# Altium PCB ARDUINO Mega-MASTER_2021-11-28.pcbdoc
Units mil, origin at the board's own origin, x right, y up, seen from the top; angles counter-clockwise.
Board outline 5169.49 x 3120 mil, 2 copper layers (Top Layer, Bottom Layer); 1 components, 0 nets, 130 pads, 0 vias.
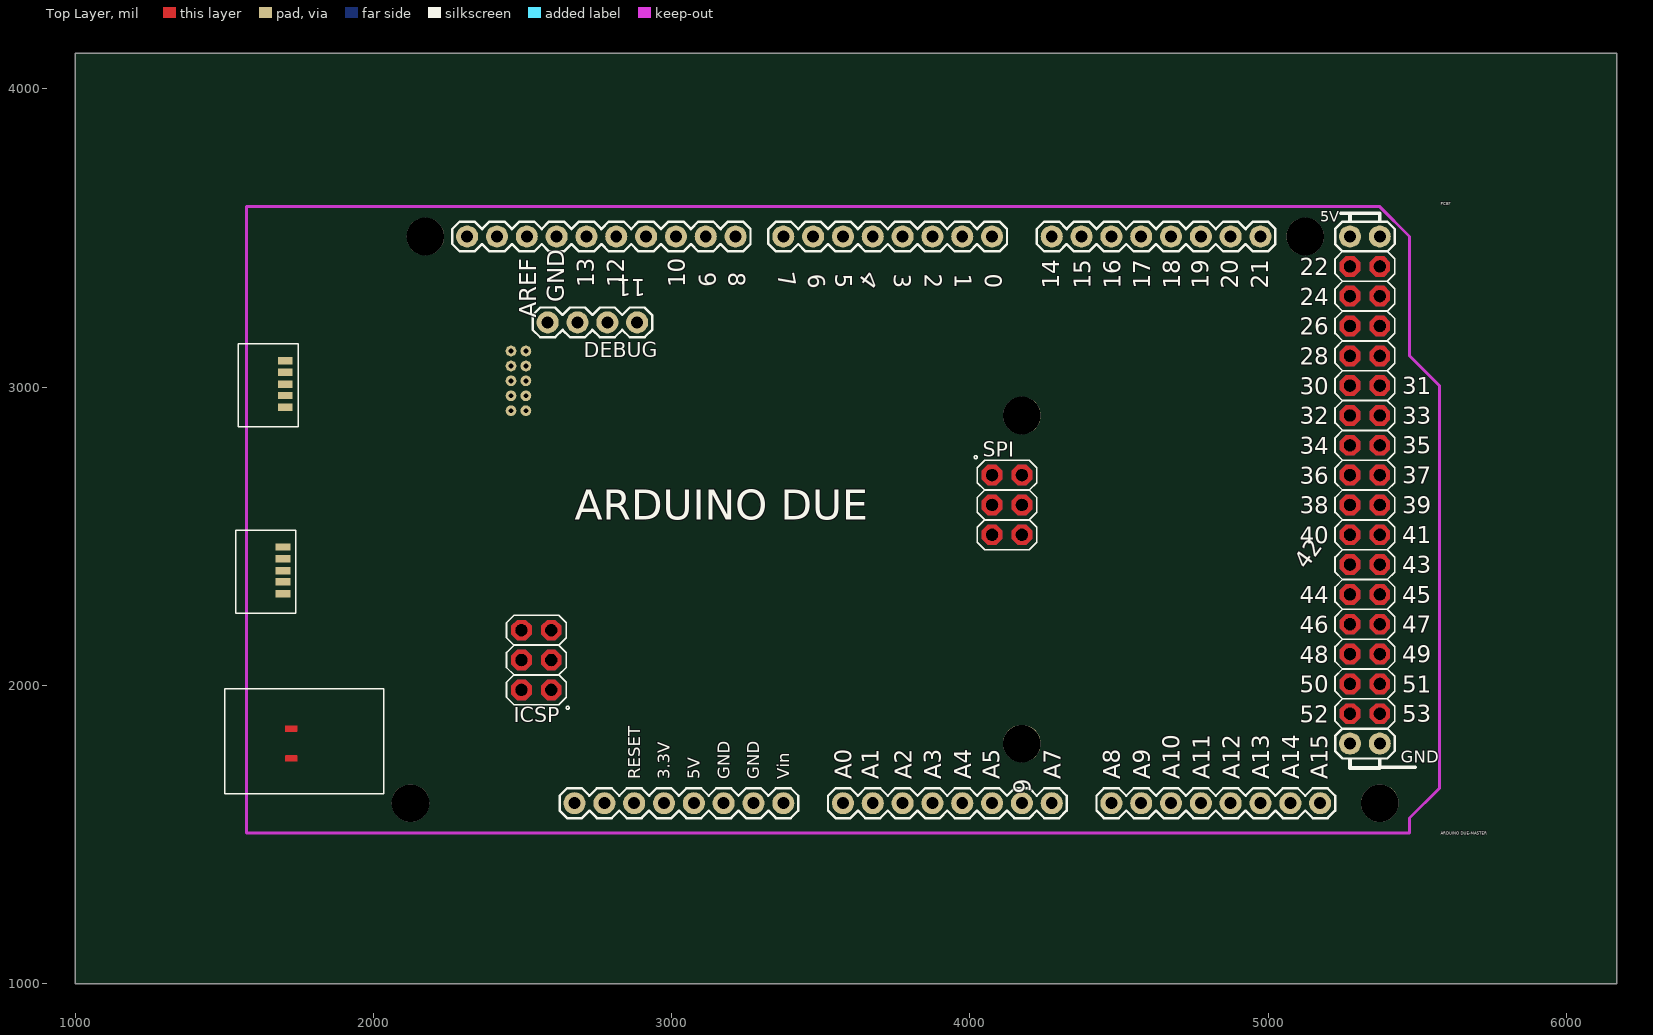
[diagram p0: Top Layer view]
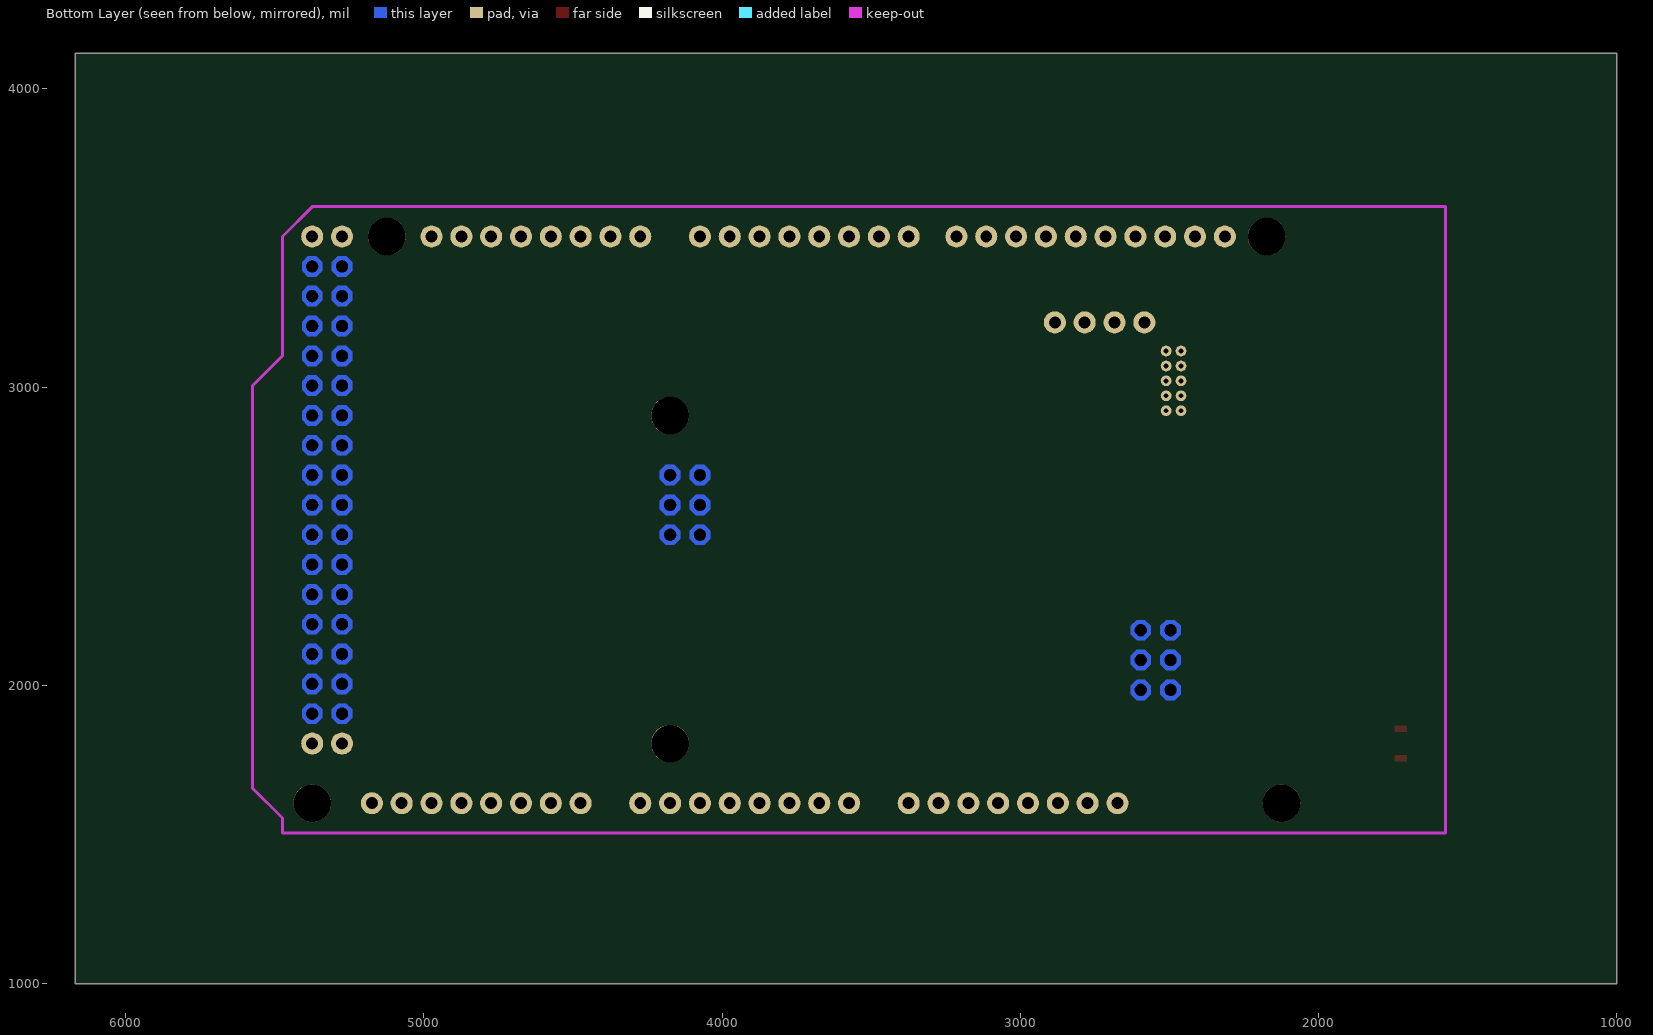
[diagram p1: Bottom Layer view, seen from below]

## Layer stack, top to bottom
Top Layer: signal copper (thickness not stored)
Dielectric: dielectric 12.6, FR-4, Dk 4.8
Bottom Layer: signal copper (thickness not stored)

## Board outline
6169.49,1000 1000,1000 1000,4120 6169.49,4120

## Components (designator, comment, footprint, x,y, rotation, side; value= is the part's Value field where it differs from the comment)
PCB? "ARDUINO DUE-MASTER" "ARDUINO DUE-MASTER" 3539.74,2555 r0 top

## Footprints (in the part's own frame and the unit in brackets; to place one, negate y for a bottom-side part, rotate by r counter-clockwise, add the part's x,y. Pads: shape width x height; smd on the part's side, far side on the other; paste and mask are expansions set on the pad)
"ARDUINO DUE-MASTER" [mil]
  round 74 hole 40: 0(534.76,950) 1(434.76,950) 2(334.76,950) 3(234.76,950) 3.3V(-565.24,-950) 4(134.76,950) 5(34.76,950) 5V(-465.24,-950) 5V.(1734.74,950) 5V..(1834.74,950) 6(-65.24,950) 7(-165.24,950) 8(-325.24,950) 9(-425.24,950) 10(-525.24,950) 11(-625.24,950) 12(-725.24,950) 13(-825.24,950) 14(734.74,950) 15(834.74,950) 16(934.74,950) 17(1034.74,950) 18(1134.74,950) 19(1234.74,950) 20(1334.74,950) 21(1434.74,950) A0(34.76,-950) A1(134.76,-950) A2(234.76,-950) A3(334.76,-950) A4(434.76,-950) A5(534.76,-950) A6(634.74,-950) A7(734.74,-950) A8(934.74,-950) A9(1034.74,-950) A10(1134.74,-950) A11(1234.74,-950) A12(1334.74,-950) A13(1434.74,-950) A14(1534.74,-950) A15(1634.74,-950) AREF(-1025.24,950) GND(-925.24,950) GND1(-655.24,662) GND.(-265.24,-950) GND..(-365.24,-950) GND...(1734.74,-750) GND....(1834.74,-750) I/OREF(-765.24,-950) N/C(-865.24,-950) RESET(-665.24,-950) RESET..(-955.24,662) SCL1(-1225.24,950) SDA1(-1125.24,950) SWCLK(-755.24,662) SWDIO(-855.24,662) VIN(-165.24,-950)
  round 0 hole 40 slot 40.2 at 90 deg: 22(1734.74,850) 23(1834.74,850) 24(1734.74,750) 25(1834.74,750) 26(1734.74,650) 27(1834.74,650) 28(1734.74,550) 29(1834.74,550) 30(1734.74,450) 31(1834.74,450) 32(1734.74,350) 33(1834.74,350) 34(1734.74,250) 35(1834.74,250) 36(1734.74,150) 37(1834.74,150) 38(1734.74,50) 39(1834.74,50) 40(1734.74,-50) 41(1834.74,-50) 42(1734.74,-150) 43(1834.74,-150) 44(1734.74,-250) 45(1834.74,-250) 46(1734.74,-350) 47(1834.74,-350) 48(1734.74,-450) 49(1834.74,-450) 50(1734.74,-550) 51(1834.74,-550) 52(1734.74,-650) 53(1834.74,-650) +5V(-943.24,-370) +5V_(634.74,150) GND_(-943.24,-570) GND__(634.74,-50) MISO(534.76,150) MISO2(-1043.24,-370) MOSI(634.74,50) MOSI2(-943.24,-470) RESET2(-1043.24,-570) RESET.(534.76,-50) SCK(534.76,50) SCK2(-1043.24,-470)
  round 36 hole 16: +3.3V(-1028.24,366) GND1.(-1028.24,416) GND1..(-1028.24,466) GND1...(-1028.24,566) N/C.(-1028.24,516) RESET_(-1078.24,566) TCK(-1078.24,416) TDI(-1078.24,516) TDO(-1078.24,466) TMS(-1078.24,366)
  round 0 smd: <PWR>+V(-1815.24,-700) <PWR>-V(-1815.24,-800)
  rect 50x25 smd: <USB1>+V(-1843.24,-91) <USB1>D+(-1843.24,-130) <USB1>D-(-1843.24,-170) <USB1>GND(-1843.24,-248) <USB1>ID(-1843.24,-208) <USB2>+V1(-1835.24,534) <USB2>D+1(-1835.24,495) <USB2>D-1(-1835.24,455) <USB2>GND1(-1835.24,377) <USB2>ID(-1835.24,417)
  round 125.98 hole 125.98 unplated: ""(-1415.24,-950) ""(-1365.24,950) ""(634.74,-750) ""(634.74,350) ""(1584.74,950) ""(1834.74,-950)
  Top Layer region: -1835.24,-692 -1835.23,-691.76 -1835.18,-691.52 -1835.11,-691.29 -1835.01,-691.07 -1834.89,-690.86 -1834.74,-690.67 -1834.57,-690.5 -1834.38,-690.35 -1834.17,-690.23 -1833.95,-690.13 -1833.72,-690.06 -1833.48,-690.02 -1833.24,-690 -1797.24,-690 -1797,-690.02 -1796.76,-690.06 -1796.53,-690.13 -1796.31,-690.23 -1796.1,-690.35 -1795.91,-690.5 -1795.74,-690.67 -1795.59,-690.86 -1795.47,-691.07 -1795.38,-691.29 -1795.3,-691.52 -1795.25,-691.76 -1795.24,-692 -1795.24,-708 -1795.25,-708.24 -1795.3,-708.48 -1795.38,-708.71 -1795.47,-708.93 -1795.59,-709.14 -1795.74,-709.33 -1795.91,-709.5 -1796.1,-709.65 -1796.31,-709.77 -1796.53,-709.87 -1796.76,-709.94 -1797,-709.99 -1797.24,-710 -1833.24,-710 -1833.48,-709.99 -1833.72,-709.94 -1833.95,-709.87 -1834.17,-709.77 -1834.38,-709.65 -1834.57,-709.5 -1834.74,-709.33 -1834.89,-709.14 -1835.01,-708.93 -1835.11,-708.71 -1835.18,-708.48 -1835.23,-708.24 -1835.24,-708
  Top Layer region: -1835.24,-792 -1835.23,-791.76 -1835.18,-791.52 -1835.11,-791.29 -1835.01,-791.07 -1834.89,-790.86 -1834.74,-790.67 -1834.57,-790.5 -1834.38,-790.35 -1834.17,-790.23 -1833.95,-790.13 -1833.72,-790.06 -1833.48,-790.02 -1833.24,-790 -1797.24,-790 -1797,-790.02 -1796.76,-790.06 -1796.53,-790.13 -1796.31,-790.23 -1796.1,-790.35 -1795.91,-790.5 -1795.74,-790.67 -1795.59,-790.86 -1795.47,-791.07 -1795.38,-791.29 -1795.3,-791.52 -1795.25,-791.76 -1795.24,-792 -1795.24,-808 -1795.25,-808.24 -1795.3,-808.48 -1795.38,-808.71 -1795.47,-808.93 -1795.59,-809.14 -1795.74,-809.33 -1795.91,-809.5 -1796.1,-809.65 -1796.31,-809.77 -1796.53,-809.87 -1796.76,-809.94 -1797,-809.99 -1797.24,-810 -1833.24,-810 -1833.48,-809.99 -1833.72,-809.94 -1833.95,-809.87 -1834.17,-809.77 -1834.38,-809.65 -1834.57,-809.5 -1834.74,-809.33 -1834.89,-809.14 -1835.01,-808.93 -1835.11,-808.71 -1835.18,-808.48 -1835.23,-808.24 -1835.24,-808
  Top Layer region: 1820.59,184.18 1800.57,164.16 1800.57,135.84 1820.59,115.81 1848.9,115.81 1868.94,135.84 1868.94,164.16 1848.9,184.18
  Top Layer region: 1720.59,184.18 1700.57,164.16 1700.57,135.84 1720.59,115.81 1748.9,115.81 1768.94,135.84 1768.94,164.16 1748.9,184.18
  Top Layer region: 1820.59,284.18 1800.57,264.16 1800.57,235.84 1820.59,215.81 1848.9,215.81 1868.94,235.84 1868.94,264.16 1848.9,284.18
  Top Layer region: 1720.59,284.18 1700.57,264.16 1700.57,235.84 1720.59,215.81 1748.9,215.81 1768.94,235.84 1768.94,264.16 1748.9,284.18
  Top Layer region: 1820.59,384.18 1800.57,364.16 1800.57,335.84 1820.59,315.81 1848.9,315.81 1868.94,335.84 1868.94,364.16 1848.9,384.18
  Top Layer region: 1720.59,384.18 1700.57,364.16 1700.57,335.84 1720.59,315.81 1748.9,315.81 1768.94,335.84 1768.94,364.16 1748.9,384.18
  Top Layer region: 1820.59,484.18 1800.57,464.16 1800.57,435.84 1820.59,415.81 1848.9,415.81 1868.94,435.84 1868.94,464.16 1848.9,484.18
  Top Layer region: 1720.59,484.18 1700.57,464.16 1700.57,435.84 1720.59,415.81 1748.9,415.81 1768.94,435.84 1768.94,464.16 1748.9,484.18
  Top Layer region: 1820.59,584.18 1800.57,564.16 1800.57,535.84 1820.59,515.81 1848.9,515.81 1868.94,535.84 1868.94,564.16 1848.9,584.18
  Top Layer region: 1720.59,584.18 1700.57,564.16 1700.57,535.84 1720.59,515.81 1748.9,515.81 1768.94,535.84 1768.94,564.16 1748.9,584.18
  Top Layer region: 1820.59,684.18 1800.57,664.16 1800.57,635.84 1820.59,615.81 1848.9,615.81 1868.94,635.84 1868.94,664.16 1848.9,684.18
  Top Layer region: 1720.59,684.18 1700.57,664.16 1700.57,635.84 1720.59,615.81 1748.9,615.81 1768.94,635.84 1768.94,664.16 1748.9,684.18
  Top Layer region: 1820.59,784.18 1800.57,764.16 1800.57,735.84 1820.59,715.81 1848.9,715.81 1868.94,735.84 1868.94,764.16 1848.9,784.18
  Top Layer region: 1720.59,784.18 1700.57,764.16 1700.57,735.84 1720.59,715.81 1748.9,715.81 1768.94,735.84 1768.94,764.16 1748.9,784.18
  Top Layer region: 1820.59,884.18 1800.57,864.16 1800.57,835.84 1820.59,815.81 1848.9,815.81 1868.94,835.84 1868.94,864.16 1848.9,884.18
  Top Layer region: 1720.59,884.18 1700.57,864.16 1700.57,835.84 1720.59,815.81 1748.9,815.81 1768.94,835.84 1768.94,864.16 1748.9,884.18
  Top Layer region: 1820.59,-615.82 1800.57,-635.84 1800.57,-664.16 1820.59,-684.18 1848.9,-684.18 1868.94,-664.16 1868.94,-635.84 1848.9,-615.82
  Top Layer region: 1720.59,-615.82 1700.57,-635.84 1700.57,-664.16 1720.59,-684.18 1748.9,-684.18 1768.94,-664.16 1768.94,-635.84 1748.9,-615.82
  Top Layer region: 1820.59,-515.82 1800.57,-535.84 1800.57,-564.16 1820.59,-584.18 1848.9,-584.18 1868.94,-564.16 1868.94,-535.84 1848.9,-515.82
  Top Layer region: 1720.59,-515.82 1700.57,-535.84 1700.57,-564.16 1720.59,-584.18 1748.9,-584.18 1768.94,-564.16 1768.94,-535.84 1748.9,-515.82
  Top Layer region: 1820.59,-415.82 1800.57,-435.84 1800.57,-464.16 1820.59,-484.18 1848.9,-484.18 1868.94,-464.16 1868.94,-435.84 1848.9,-415.82
  Top Layer region: 1720.59,-415.82 1700.57,-435.84 1700.57,-464.16 1720.59,-484.18 1748.9,-484.18 1768.94,-464.16 1768.94,-435.84 1748.9,-415.82
  Top Layer region: 1820.59,-315.82 1800.57,-335.84 1800.57,-364.16 1820.59,-384.18 1848.9,-384.18 1868.94,-364.16 1868.94,-335.84 1848.9,-315.82
  Top Layer region: 1720.59,-315.82 1700.57,-335.84 1700.57,-364.16 1720.59,-384.18 1748.9,-384.18 1768.94,-364.16 1768.94,-335.84 1748.9,-315.82
  Top Layer region: 1820.59,-215.82 1800.57,-235.84 1800.57,-264.16 1820.59,-284.19 1848.9,-284.19 1868.94,-264.16 1868.94,-235.84 1848.9,-215.82
  Top Layer region: 1720.59,-215.82 1700.57,-235.84 1700.57,-264.16 1720.59,-284.19 1748.9,-284.19 1768.94,-264.16 1768.94,-235.84 1748.9,-215.82
  Top Layer region: 1820.59,-115.82 1800.57,-135.84 1800.57,-164.16 1820.59,-184.19 1848.9,-184.19 1868.94,-164.16 1868.94,-135.84 1848.9,-115.82
  Top Layer region: 1720.59,-115.82 1700.57,-135.84 1700.57,-164.16 1720.59,-184.19 1748.9,-184.19 1768.94,-164.16 1768.94,-135.84 1748.9,-115.82
  Top Layer region: 1820.59,-15.82 1800.57,-35.84 1800.57,-64.16 1820.59,-84.19 1848.9,-84.19 1868.94,-64.16 1868.94,-35.84 1848.9,-15.82
  Top Layer region: 1720.59,-15.82 1700.57,-35.84 1700.57,-64.16 1720.59,-84.19 1748.9,-84.19 1768.94,-64.16 1768.94,-35.84 1748.9,-15.82
  Top Layer region: 1820.59,84.18 1800.57,64.16 1800.57,35.84 1820.59,15.81 1848.9,15.81 1868.94,35.84 1868.94,64.16 1848.9,84.18
  Top Layer region: 1720.59,84.18 1700.57,64.16 1700.57,35.84 1720.59,15.81 1748.9,15.81 1768.94,35.84 1768.94,64.16 1748.9,84.18
  Top Layer region: 620.6,-15.82 600.57,-35.84 600.57,-64.16 620.6,-84.19 648.9,-84.19 668.94,-64.16 668.94,-35.84 648.9,-15.82
  Top Layer region: 520.6,-15.82 500.57,-35.84 500.57,-64.16 520.6,-84.19 548.91,-84.19 568.94,-64.16 568.94,-35.84 548.91,-15.82
  Top Layer region: 620.6,84.18 600.57,64.16 600.57,35.84 620.6,15.81 648.9,15.81 668.94,35.84 668.94,64.16 648.9,84.18
  Top Layer region: 520.6,84.18 500.57,64.16 500.57,35.84 520.6,15.81 548.91,15.81 568.94,35.84 568.94,64.16 548.91,84.18
  Top Layer region: 620.6,184.18 600.57,164.16 600.57,135.84 620.6,115.81 648.9,115.81 668.94,135.84 668.94,164.16 648.9,184.18
  Top Layer region: 520.6,184.18 500.57,164.16 500.57,135.84 520.6,115.81 548.91,115.81 568.94,135.84 568.94,164.16 548.91,184.18
  Top Layer region: -1029.09,-404.18 -1009.07,-384.16 -1009.07,-355.84 -1029.09,-335.82 -1057.4,-335.82 -1077.43,-355.84 -1077.43,-384.16 -1057.4,-404.18
  Top Layer region: -929.09,-404.18 -909.07,-384.16 -909.07,-355.84 -929.09,-335.82 -957.4,-335.82 -977.43,-355.84 -977.43,-384.16 -957.4,-404.18
  Top Layer region: -1029.09,-504.18 -1009.07,-484.16 -1009.07,-455.84 -1029.09,-435.82 -1057.4,-435.82 -1077.43,-455.84 -1077.43,-484.16 -1057.4,-504.18
  Top Layer region: -929.09,-504.18 -909.07,-484.16 -909.07,-455.84 -929.09,-435.82 -957.4,-435.82 -977.43,-455.84 -977.43,-484.16 -957.4,-504.18
  Top Layer region: -1029.09,-604.18 -1009.07,-584.16 -1009.07,-555.84 -1029.09,-535.82 -1057.4,-535.82 -1077.43,-555.84 -1077.43,-584.16 -1057.4,-604.18
  Top Layer region: -929.09,-604.18 -909.07,-584.16 -909.07,-555.84 -929.09,-535.82 -957.4,-535.82 -977.43,-555.84 -977.43,-584.16 -957.4,-604.18
  Bottom Layer region: 1820.59,184.18 1800.57,164.16 1800.57,135.84 1820.59,115.81 1848.9,115.81 1868.94,135.84 1868.94,164.16 1848.9,184.18
  Bottom Layer region: 1720.59,184.18 1700.57,164.16 1700.57,135.84 1720.59,115.81 1748.9,115.81 1768.94,135.84 1768.94,164.16 1748.9,184.18
  Bottom Layer region: 1820.59,284.18 1800.57,264.16 1800.57,235.84 1820.59,215.81 1848.9,215.81 1868.94,235.84 1868.94,264.16 1848.9,284.18
  Bottom Layer region: 1720.59,284.18 1700.57,264.16 1700.57,235.84 1720.59,215.81 1748.9,215.81 1768.94,235.84 1768.94,264.16 1748.9,284.18
  Bottom Layer region: 1820.59,384.18 1800.57,364.16 1800.57,335.84 1820.59,315.81 1848.9,315.81 1868.94,335.84 1868.94,364.16 1848.9,384.18
  Bottom Layer region: 1720.59,384.18 1700.57,364.16 1700.57,335.84 1720.59,315.81 1748.9,315.81 1768.94,335.84 1768.94,364.16 1748.9,384.18
  Bottom Layer region: 1820.59,484.18 1800.57,464.16 1800.57,435.84 1820.59,415.81 1848.9,415.81 1868.94,435.84 1868.94,464.16 1848.9,484.18
  Bottom Layer region: 1720.59,484.18 1700.57,464.16 1700.57,435.84 1720.59,415.81 1748.9,415.81 1768.94,435.84 1768.94,464.16 1748.9,484.18
  Bottom Layer region: 1820.59,584.18 1800.57,564.16 1800.57,535.84 1820.59,515.81 1848.9,515.81 1868.94,535.84 1868.94,564.16 1848.9,584.18
  Bottom Layer region: 1720.59,584.18 1700.57,564.16 1700.57,535.84 1720.59,515.81 1748.9,515.81 1768.94,535.84 1768.94,564.16 1748.9,584.18
  Bottom Layer region: 1820.59,684.18 1800.57,664.16 1800.57,635.84 1820.59,615.81 1848.9,615.81 1868.94,635.84 1868.94,664.16 1848.9,684.18
  Bottom Layer region: 1720.59,684.18 1700.57,664.16 1700.57,635.84 1720.59,615.81 1748.9,615.81 1768.94,635.84 1768.94,664.16 1748.9,684.18
  Bottom Layer region: 1820.59,784.18 1800.57,764.16 1800.57,735.84 1820.59,715.81 1848.9,715.81 1868.94,735.84 1868.94,764.16 1848.9,784.18
  Bottom Layer region: 1720.59,784.18 1700.57,764.16 1700.57,735.84 1720.59,715.81 1748.9,715.81 1768.94,735.84 1768.94,764.16 1748.9,784.18
  Bottom Layer region: 1820.59,884.18 1800.57,864.16 1800.57,835.84 1820.59,815.81 1848.9,815.81 1868.94,835.84 1868.94,864.16 1848.9,884.18
  Bottom Layer region: 1720.59,884.18 1700.57,864.16 1700.57,835.84 1720.59,815.81 1748.9,815.81 1768.94,835.84 1768.94,864.16 1748.9,884.18
  Bottom Layer region: 1820.59,-615.82 1800.57,-635.84 1800.57,-664.16 1820.59,-684.18 1848.9,-684.18 1868.94,-664.16 1868.94,-635.84 1848.9,-615.82
  Bottom Layer region: 1720.59,-615.82 1700.57,-635.84 1700.57,-664.16 1720.59,-684.18 1748.9,-684.18 1768.94,-664.16 1768.94,-635.84 1748.9,-615.82
  Bottom Layer region: 1820.59,-515.82 1800.57,-535.84 1800.57,-564.16 1820.59,-584.18 1848.9,-584.18 1868.94,-564.16 1868.94,-535.84 1848.9,-515.82
  Bottom Layer region: 1720.59,-515.82 1700.57,-535.84 1700.57,-564.16 1720.59,-584.18 1748.9,-584.18 1768.94,-564.16 1768.94,-535.84 1748.9,-515.82
  Bottom Layer region: 1820.59,-415.82 1800.57,-435.84 1800.57,-464.16 1820.59,-484.18 1848.9,-484.18 1868.94,-464.16 1868.94,-435.84 1848.9,-415.82
  Bottom Layer region: 1720.59,-415.82 1700.57,-435.84 1700.57,-464.16 1720.59,-484.18 1748.9,-484.18 1768.94,-464.16 1768.94,-435.84 1748.9,-415.82
  Bottom Layer region: 1820.59,-315.82 1800.57,-335.84 1800.57,-364.16 1820.59,-384.18 1848.9,-384.18 1868.94,-364.16 1868.94,-335.84 1848.9,-315.82
  Bottom Layer region: 1720.59,-315.82 1700.57,-335.84 1700.57,-364.16 1720.59,-384.18 1748.9,-384.18 1768.94,-364.16 1768.94,-335.84 1748.9,-315.82
  Bottom Layer region: 1820.59,-215.82 1800.57,-235.84 1800.57,-264.16 1820.59,-284.19 1848.9,-284.19 1868.94,-264.16 1868.94,-235.84 1848.9,-215.82
  Bottom Layer region: 1720.59,-215.82 1700.57,-235.84 1700.57,-264.16 1720.59,-284.19 1748.9,-284.19 1768.94,-264.16 1768.94,-235.84 1748.9,-215.82
  Bottom Layer region: 1820.59,-115.82 1800.57,-135.84 1800.57,-164.16 1820.59,-184.19 1848.9,-184.19 1868.94,-164.16 1868.94,-135.84 1848.9,-115.82
  Bottom Layer region: 1720.59,-115.82 1700.57,-135.84 1700.57,-164.16 1720.59,-184.19 1748.9,-184.19 1768.94,-164.16 1768.94,-135.84 1748.9,-115.82
  Bottom Layer region: 1820.59,-15.82 1800.57,-35.84 1800.57,-64.16 1820.59,-84.19 1848.9,-84.19 1868.94,-64.16 1868.94,-35.84 1848.9,-15.82
  Bottom Layer region: 1720.59,-15.82 1700.57,-35.84 1700.57,-64.16 1720.59,-84.19 1748.9,-84.19 1768.94,-64.16 1768.94,-35.84 1748.9,-15.82
  Bottom Layer region: 1820.59,84.18 1800.57,64.16 1800.57,35.84 1820.59,15.81 1848.9,15.81 1868.94,35.84 1868.94,64.16 1848.9,84.18
  Bottom Layer region: 1720.59,84.18 1700.57,64.16 1700.57,35.84 1720.59,15.81 1748.9,15.81 1768.94,35.84 1768.94,64.16 1748.9,84.18
  Bottom Layer region: 620.6,-15.82 600.57,-35.84 600.57,-64.16 620.6,-84.19 648.9,-84.19 668.94,-64.16 668.94,-35.84 648.9,-15.82
  Bottom Layer region: 520.6,-15.82 500.57,-35.84 500.57,-64.16 520.6,-84.19 548.91,-84.19 568.94,-64.16 568.94,-35.84 548.91,-15.82
  Bottom Layer region: 620.6,84.18 600.57,64.16 600.57,35.84 620.6,15.81 648.9,15.81 668.94,35.84 668.94,64.16 648.9,84.18
  Bottom Layer region: 520.6,84.18 500.57,64.16 500.57,35.84 520.6,15.81 548.91,15.81 568.94,35.84 568.94,64.16 548.91,84.18
  Bottom Layer region: 620.6,184.18 600.57,164.16 600.57,135.84 620.6,115.81 648.9,115.81 668.94,135.84 668.94,164.16 648.9,184.18
  Bottom Layer region: 520.6,184.18 500.57,164.16 500.57,135.84 520.6,115.81 548.91,115.81 568.94,135.84 568.94,164.16 548.91,184.18
  Bottom Layer region: -1029.09,-404.18 -1009.07,-384.16 -1009.07,-355.84 -1029.09,-335.82 -1057.4,-335.82 -1077.43,-355.84 -1077.43,-384.16 -1057.4,-404.18
  Bottom Layer region: -929.09,-404.18 -909.07,-384.16 -909.07,-355.84 -929.09,-335.82 -957.4,-335.82 -977.43,-355.84 -977.43,-384.16 -957.4,-404.18
  Bottom Layer region: -1029.09,-504.18 -1009.07,-484.16 -1009.07,-455.84 -1029.09,-435.82 -1057.4,-435.82 -1077.43,-455.84 -1077.43,-484.16 -1057.4,-504.18
  Bottom Layer region: -929.09,-504.18 -909.07,-484.16 -909.07,-455.84 -929.09,-435.82 -957.4,-435.82 -977.43,-455.84 -977.43,-484.16 -957.4,-504.18
  Bottom Layer region: -1029.09,-604.18 -1009.07,-584.16 -1009.07,-555.84 -1029.09,-535.82 -1057.4,-535.82 -1077.43,-555.84 -1077.43,-584.16 -1057.4,-604.18
  Bottom Layer region: -929.09,-604.18 -909.07,-584.16 -909.07,-555.84 -929.09,-535.82 -957.4,-535.82 -977.43,-555.84 -977.43,-584.16 -957.4,-604.18
  Keep-Out Layer lines w10: -1965.24,-1050 -1965.24,1050 1834.74,1050 1934.74,950 1934.74,550 2034.74,450 2034.74,-900 1934.74,-1000 1934.74,-1050 -1965.24,-1050
  silkscreen extent -2037,-1000 1953,1028

## Nets (pads, with @x,y where several pads share a name; then routed paths per layer and width w, separated by ;. In a path a pad name is that pad's centre, name@x,y a point inside that pad or via, vN(x,y) a via of type N, cw(c..) or ccw(c..) an arc to the next point about the centre after c; other vN are vias at no path point)
pads on no net: PCB?. PCB?.0 PCB?.1 PCB?.2 PCB?.3 PCB?.3.3V PCB?.4 PCB?.5 PCB?.5V PCB?.5V. PCB?.5V.. PCB?.6 PCB?.7 PCB?.8 PCB?.9 PCB?.10 PCB?.11 PCB?.12 PCB?.13 PCB?.14 PCB?.15 PCB?.16 PCB?.17 PCB?.18 PCB?.19 PCB?.20 PCB?.21 PCB?.22 PCB?.23 PCB?.24 PCB?.25 PCB?.26 PCB?.27 PCB?.28 PCB?.29 PCB?.30 PCB?.31 PCB?.32 PCB?.33 PCB?.34 PCB?.35 PCB?.36 PCB?.37 PCB?.38 PCB?.39 PCB?.40 PCB?.41 PCB?.42 PCB?.43 PCB?.44 PCB?.45 PCB?.46 PCB?.47 PCB?.48 PCB?.49 PCB?.50 PCB?.51 PCB?.52 PCB?.53 PCB?.+3.3V PCB?.+5V PCB?.+5V_ PCB?.<PWR>+V PCB?.<PWR>-V PCB?.<USB1>+V PCB?.<USB1>D+ PCB?.<USB1>D- PCB?.<USB1>GND PCB?.<USB1>ID PCB?.<USB2>+V1 PCB?.<USB2>D+1 PCB?.<USB2>D-1 PCB?.<USB2>GND1 PCB?.<USB2>ID PCB?.A0 PCB?.A1 PCB?.A2 PCB?.A3 PCB?.A4 PCB?.A5 PCB?.A6 PCB?.A7 PCB?.A8 PCB?.A9 PCB?.A10 PCB?.A11 PCB?.A12 PCB?.A13 PCB?.A14 PCB?.A15 PCB?.AREF PCB?.GND PCB?.GND1 PCB?.GND1. PCB?.GND1.. PCB?.GND1... PCB?.GND. PCB?.GND.. PCB?.GND... PCB?.GND.... PCB?.GND_ PCB?.GND__ PCB?.I/OREF PCB?.MISO PCB?.MISO2 PCB?.MOSI PCB?.MOSI2 PCB?.N/C PCB?.N/C. PCB?.RESET PCB?.RESET2 PCB?.RESET. PCB?.RESET.. PCB?.RESET_ PCB?.SCK PCB?.SCK2 PCB?.SCL1 PCB?.SDA1 PCB?.SWCLK PCB?.SWDIO PCB?.TCK PCB?.TDI PCB?.TDO PCB?.TMS PCB?.VIN

## Text inside footprints (layer, text, board x,y; h text height)
PCB?: Top Overlay "0" at 4049.49,3379.6 h56 r270; Top Overlay "1" at 3949.5,3379.6 h56 r270; Top Overlay "2" at 3849.5,3379.6 h56 r270; Top Overlay "3" at 3744.5,3379.6 h56 r270; Top Overlay "4" at 3654.85,3396.06 h56 r234; Top Overlay "5" at 3549.5,3379.6 h56 r270; Top Overlay "6" at 3454.61,3377.16 h56 r275; Top Overlay "7" at 3355.01,3379.26 h56 r281; Top Overlay "8" at 3189.5,3384.6 h56 r270; Top Overlay "9" at 3089.61,3382.16 h56 r275; Top Overlay "10" at 3045.5,3334.2 h56 r90; Top Overlay "11" at 2912.5,3362.2 h56 r180; Top Overlay "12" at 2840.5,3334.2 h56 r90; Top Overlay "13" at 2740.5,3334.2 h56 r90; Top Overlay "14" at 4300.49,3329.2 h56 r90; Top Overlay "15" at 4405.49,3329.2 h56 r90; Top Overlay "16" at 4505.49,3329.2 h56 r90; Top Overlay "17" at 4605.49,3329.2 h56 r90; Top Overlay "18" at 4705.49,3329.2 h56 r90; Top Overlay "19" at 4800.49,3329.2 h56 r90; Top Overlay "20" at 4900.49,3329.2 h56 r90; Top Overlay "21" at 5000.49,3329.2 h56 r90; Top Overlay "22" at 5105.49,3375 h56; Top Overlay "24" at 5105.49,3275 h56; Top Overlay "26" at 5105.49,3175 h56; Top Overlay "28" at 5105.49,3075 h56; Top Overlay "30" at 5105.49,2975 h56; Top Overlay "32" at 5105.49,2875 h56; Top Overlay "34" at 5105.49,2775 h56; Top Overlay "36" at 5105.49,2675 h56; Top Overlay "38" at 5105.49,2575 h56; Top Overlay "40" at 5105.49,2475 h56; Top Overlay "42" at 5128.14,2386.54 h56 r54; Top Overlay "44" at 5105.49,2275 h56; Top Overlay "46" at 5105.49,2175 h56; Top Overlay "50" at 5105.49,1975 h56; Top Overlay "48" at 5105.49,2075 h56; Top Overlay "52" at 5105.49,1875 h56; Top Overlay "31" at 5449.49,2976 h56; Top Overlay "33" at 5449.49,2876 h56; Top Overlay "35" at 5449.49,2776 h56; Top Overlay "37" at 5449.49,2676 h56; Top Overlay "39" at 5449.49,2576 h56; Top Overlay "41" at 5449.49,2476 h56; Top Overlay "43" at 5449.49,2376 h56; Top Overlay "45" at 5449.49,2276 h56; Top Overlay "47" at 5449.49,2176 h56; Top Overlay "49" at 5449.49,2076 h56; Top Overlay "51" at 5449.49,1976 h56; Top Overlay "53" at 5449.49,1876 h56; Top Overlay "A0" at 3604.5,1686 h56 r90; Top Overlay "A1" at 3694.5,1686 h56 r90; Top Overlay "A2" at 3804.5,1686 h56 r90; Top Overlay "A3" at 3904.5,1686 h56 r90; Top Overlay "A4" at 4004.5,1686 h56 r90; Top Overlay "A5" at 4099.5,1686 h56 r90; Top Overlay "6" at 4143.6,1683.56 h56 r275; Top Overlay "A7" at 4304.49,1686 h56 r90; Top Overlay "A8" at 4504.49,1686 h56 r90; Top Overlay "A9" at 4604.49,1686 h56 r90; Top Overlay "A10" at 4704.49,1686 h56 r90; Top Overlay "A11" at 4804.49,1686 h56 r90; Top Overlay "A12" at 4904.49,1686 h56 r90; Top Overlay "A13" at 5004.49,1686 h56 r90; Top Overlay "A14" at 5104.49,1686 h56 r90; Top Overlay "A15" at 5199.49,1686 h56 r90; Top Overlay "GND" at 5444.49,1741 h40; Top Overlay "RESET" at 2894.5,1686 h40 r90; Top Overlay "3.3V" at 2994.5,1686 h40 r90; Top Overlay "5V" at 3094.5,1686 h40 r90; Top Overlay "GND" at 3194.5,1686 h40 r90; Top Overlay "GND" at 3294.5,1686 h40 r90; Top Overlay "Vin" at 3394.5,1686 h40 r90; Top Overlay "GND" at 2640.5,3283.8 h56 r90; Top Overlay "AREF" at 2545.5,3233.4 h56 r90; Top Overlay "5V" at 5174.49,3555 h35; Top Overlay "ARDUINO DUE" at 2674.5,2555 h100; Top Overlay "SPI" at 4042.5,2766 h50; Top Overlay "ICSP" at 2471.5,1876 h50; Top Overlay "DEBUG" at 2705.5,3101 h50